# Altium PCB BBB_Board_NEW_PLANES.PcbDoc (part 2 of 4)
Units mil, origin at the board's own origin, x right, y up, seen from the top; angles counter-clockwise.
Board outline 11000 x 5000 mil, 2 copper layers (Top Layer, Bottom Layer); 103 components, 383 nets, 1066 pads, 514 vias.
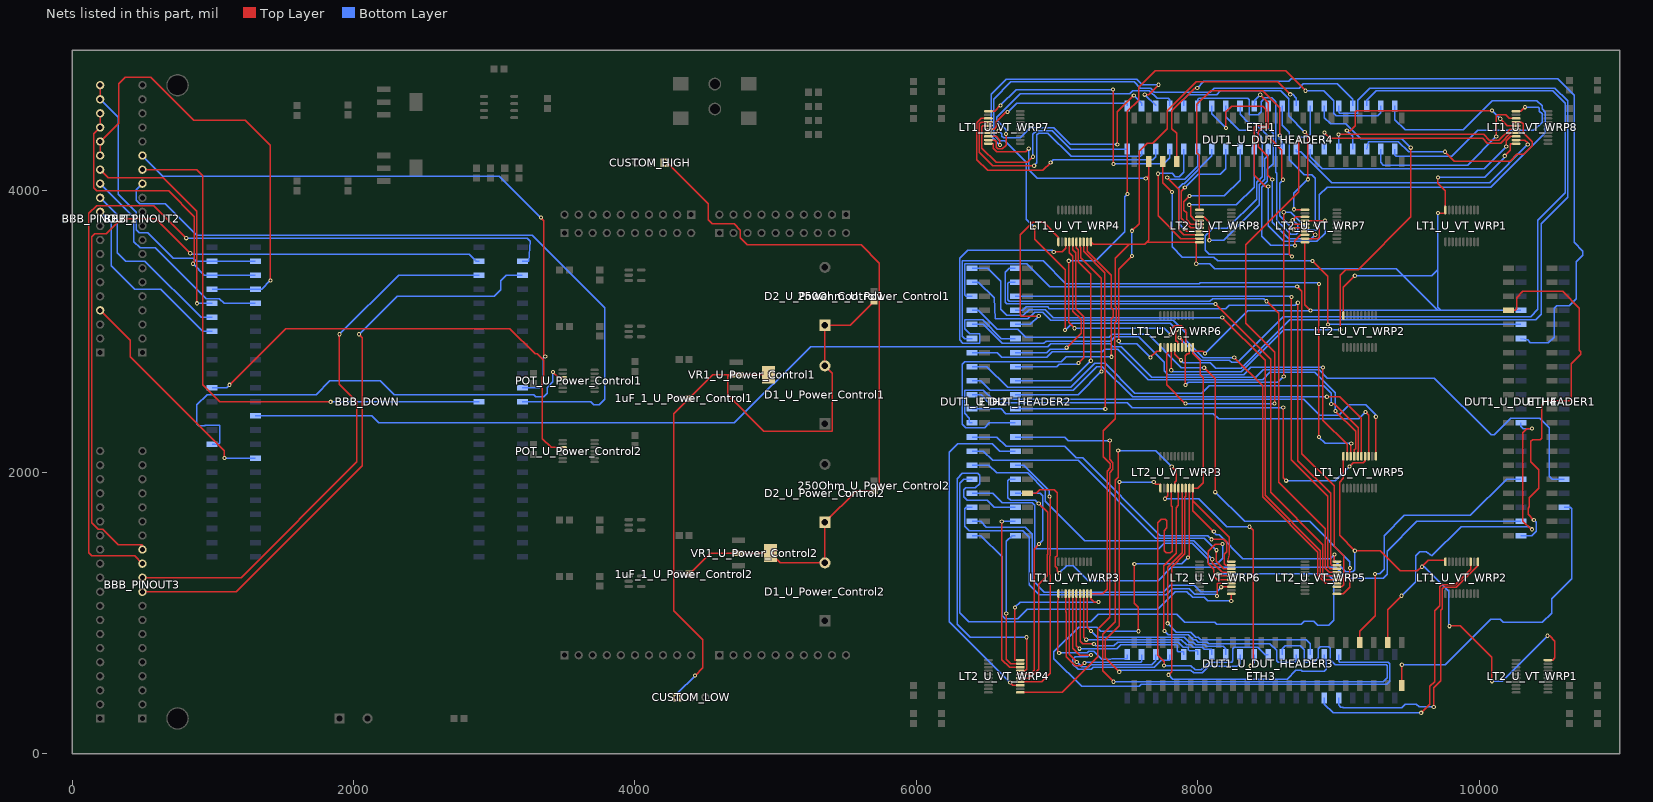
[diagram p2: the nets of this part, all layers, seen from the top]

## Via types
v1: diameter 30, hole 15, Top Layer to Bottom Layer, 514 vias

## Nets (pads, with @x,y where several pads share a name; then routed paths per layer and width w, separated by ;. In a path a pad name is that pad's centre, name@x,y a point inside that pad or via, vN(x,y) a via of type N, cw(c..) or ccw(c..) an arc to the next point about the centre after c; other vN are vias at no path point) (continued)
BBB_MMC1_DAT1: BBB_DOWN.70 BBB_PINOUT2.13 | length 5044.7
  Bottom Layer w10: BBB_PINOUT2.13@500,4050 456,4006 456,3931 481,3906 664,3906 886,3684 3270.54,3684 3787,3167.54 3787,2520 3746,2479 3706,2479 3685,2500 BBB_DOWN.70@3200,2500
BBB_MMC1_DAT2: BBB_DOWN.51 BBB_PINOUT3.11 | length 3990.9
  Top Layer w10: BBB_PINOUT3.11@500,1250 1201,1250 2024.88,2073.88 2024.88,2500.12 1900,2625 v1(1900,2980)
  Bottom Layer w10: v1(1900,2980) 2320,3400 BBB_DOWN.51@2892.91,3400
BBB_MMC1_DAT3: BBB_DOWN.52 BBB_PINOUT3.10 | length 4249.6
  Top Layer w10: BBB_PINOUT3.10@500,1150 1167.48,1150 2064,2046.52 2064,2956 v1(2040,2980)
  Bottom Layer w10: v1(2040,2980) 2310,3250 3000,3250 3047,3297 3047,3360 3087,3400 BBB_DOWN.52@3200,3400
BBB_MMC1_DAT4: BBB_DOWN.69 BBB_PINOUT2.14 | length 3948
  Top Layer w10: BBB_PINOUT2.14@500,4150 886,4150 928,4108 928,2620 1048,2500 v1(1838,2500)
  Bottom Layer w10: v1(1838,2500) BBB_DOWN.69@2892.91,2500
BBB_MMC1_DAT5: BBB_DOWN.68 BBB_PINOUT2.15 | length 4374.1
  Top Layer w10: v1(3332,3809) 3352.76,3788.24 3352.76,2832.97 v1(3362.76,2822.97)
  Bottom Layer w10: BBB_PINOUT2.15@500,4250 646,4104 3037,4104 v1(3332,3809) ; BBB_DOWN.68@3200,2600 3320,2600 3350,2630 3350,2810.21 v1(3362.76,2822.97)
BBB_MMC1_DAT6: BBB_DOWN.49 BBB_PINOUT3.13 | length 5421.6
  Top Layer w10: BBB_PINOUT3.13@500,1450 500,1483 330,1483 219,1594 186,1594 139,1641 139,3672 161,3694 244,3694 350,3800 596,3800 v1(840,3556)
  Bottom Layer w10: v1(840,3556) 846.27,3549.73 2823.27,3549.73 2873,3500 BBB_DOWN.49@2892.91,3500
BBB_MMC1_DAT7: BBB_DOWN.50 BBB_PINOUT3.12 | length 6276.8
  Top Layer w10: BBB_PINOUT3.12@500,1350 445,1405 141,1405 120,1426 120,3839 175,3894 581,3894 v1(812,3663)
  Bottom Layer w10: v1(812,3663) 3234,3663 3257,3640 3247,3500 BBB_DOWN.50@3200,3500
BBB_PWR_BUT: BBB_DOWN.9 BBB_PINOUT1.14 | length 1571.8
  Top Layer w10: BBB_PINOUT1.14@200,4150 256,4094 647,4094 888,3853 v1(888,3200)
  Bottom Layer w10: v1(888,3200) BBB_DOWN.9@995.83,3200
BBB_SYS_5V: BBB_DOWN.7 BBB_DOWN.8 BBB_PINOUT1.15 BBB_PINOUT1.16 | length 3264.9
  Top Layer w10: BBB_PINOUT1.15@200,4250 BBB_PINOUT1.16@200,4350 331,4481 331,4760 379,4808 558,4808 864,4502 1232,4502 1410,4324 v1(1410,3363)
  Bottom Layer w10: BBB_DOWN.7@995.83,3300 BBB_DOWN.8@1302.91,3300 1347,3300 v1(1410,3363)
BBB_SYS_RST: BBB_DOWN.10 BBB_PINOUT1.13 | length 1556.3
  Bottom Layer w10: BBB_PINOUT1.13@200,4050 439,3811 439,3638 483,3594 593,3594 953,3234 1047,3234 1081,3200 BBB_DOWN.10@1302.91,3200
BBB_UART4_RXD: BBB_DOWN.11 BBB_PINOUT1.12 | length 1305.5
  Bottom Layer w10: BBB_PINOUT1.12@200,3950 320,3830 320,3561 381,3500 518,3500 918,3100 BBB_DOWN.11@995.83,3100
BBB_UART4_TXD: BBB_DOWN.13 BBB_PINOUT1.11 | length 1325.4
  Bottom Layer w10: BBB_PINOUT1.11@200,3850 279,3771 279,3468 447,3300 629,3300 929,3000 BBB_DOWN.13@995.83,3000
BBB_VDD_3V3: BBB_DOWN.3 BBB_DOWN.4 BBB_PINOUT1.19 BBB_PINOUT1.20 | length 2072.3
  Top Layer w10: BBB_PINOUT1.19@200,4650 BBB_PINOUT1.20@200,4750
  Bottom Layer w10: BBB_PINOUT1.19@200,4650 328,4522 328,3975.47 457.47,3846 457.47,3721.53 479,3700 536.57,3700 717.57,3519 862,3519 881,3500 BBB_DOWN.3@995.83,3500 BBB_DOWN.4@1302.91,3500
BBB_VDD_5V: BBB_DOWN.5 BBB_DOWN.6 BBB_PINOUT1.17 BBB_PINOUT1.18 | length 2160.9
  Top Layer w10: BBB_PINOUT1.18@200,4550 BBB_PINOUT1.17@200,4450 156,4406 156,4021 177,4000 686,4000 869,3817 869,3490 v1(860,3481)
  Bottom Layer w10: v1(860,3481) 941,3400 BBB_DOWN.5@995.83,3400 BBB_DOWN.6@1302.91,3400
BBB_VDD_ADC: BBB_DOWN.32 BBB_PINOUT1.4 | length 1635.7
  Top Layer w10: BBB_PINOUT1.4@200,3150 413,2937 413,2822 1083,2152 v1(1083,2100)
  Bottom Layer w10: v1(1083,2100) BBB_DOWN.32@1302.91,2100
COUNTER_CLK0: DUT1_U_DUT_HEADER4.24 ETH4.35 | length 5519.4
  Top Layer w10: DUT1_U_DUT_HEADER4.24@7850,4208.96 7850,4407 7816,4441 7816,4568 7978,4730 v1(7996,4730)
  Bottom Layer w10: v1(7996,4730) 8043,4777 8645.73,4777 8663.73,4795 10559,4795 10674,4680 10674,3633 10737,3570 10737,3540 10691,3494 10691,3234 10641,3184 10551,3184 10532,3165 10532,2959 10492,2919 10364,2919 10343,2940 ETH4.35@10296.46,2950
COUNTER_CLK1: DUT1_U_DUT_HEADER3.24 ETH4.25 | length 1987.9
  Top Layer w10: DUT1_U_DUT_HEADER3.24@9150,791.04 9150,868.6 9260,978.6 v1(9260,1277)
  Bottom Layer w10: v1(9260,1277) 9294,1277 9326,1309 9326,1550 9468.37,1692.37 9937.37,1692.37 10195,1950 ETH4.25@10296.46,1950
COUNTER_CLK2: DUT1_U_DUT_HEADER2.24 ETH4.22 | length 4492.6
  Top Layer w10: DUT1_U_DUT_HEADER2.24@6791.04,1850 6852,1850 6877,1875 6979.13,1875 7001,1853.13 7001,1407.76 7000.92,1407.69 7000.79,1407.69 6987.98,1394.88 6987.98,1331.5 7001,1318.48 7001,1300 v1(7017,1284)
  Bottom Layer w10: v1(7017,1284) 7068,1335 7116,1335 7221,1230 7718.84,1230 7811.84,1323 8979.73,1323 9054.73,1248 9317.63,1248 9345,1275.37 9345,1440 9555,1650 ETH4.22@10296.46,1650
COUNTER_CLK3: DUT1_U_DUT_HEADER1.24 ETH4.21 | length 2721.7
  Top Layer w10: DUT1_U_DUT_HEADER1.24@10208.96,3150 10255,3150 10265,3160 10265,3240 10310,3285 10592,3285 10712,3165 10712,2865.36 10722.61,2854.75 10722.61,2837.61 10655,2770 10655,2522 10640,2507 10472,2507 10444,2479 10444,2241 10435,2232 10379,2232 10367,2220 10367,2074.45 10423,2018.45 10423,1886 10357,1820 10357,1753 10347,1743 10347,1701 v1(10388,1660)
  Bottom Layer w10: ETH4.21@10296.46,1550 10374,1550 10404,1580 10404,1644 v1(10388,1660)
COUNTER_CLR: DUT1_U_DUT_HEADER4.23 ETH4.36 | length 3542.6
  Top Layer w10: DUT1_U_DUT_HEADER4.23@7750,4208.96 7750,4058 v1(7817,3991) ; v1(8815,3501) 8925,3391 v1(8925,3050)
  Bottom Layer w10: v1(7817,3991) 7817,3601.94 7890.94,3528 8113,3528 8140,3501 v1(8815,3501) ; v1(8925,3050) ETH4.36@10296.46,3050
CUSTOM_HIGH: 1uF_1_U_Power_Control2.2 250Ohm_U_Power_Control2.2 CUSTOM_HIGH.1 D1_U_Power_Control2.1 D2_U_Power_Control2.2 VR1_U_Power_Control2.2 VR1_U_Power_Control2.4 | length 5342
  Top Layer w10: CUSTOM_HIGH.1@4210,4200 4228,4200 4521,3907 4521,3793 4549,3765 4705,3765 4750,3720 4750,3665 4800,3615 5608,3615 5738,3485 5738,1907 250Ohm_U_Power_Control2.2@5700,1869 5574.91,1869 D2_U_Power_Control2.2@5350,1644.09 D1_U_Power_Control2.1@5350,1355.91 5033.27,1355.91 VR1_U_Power_Control2.4@4964.17,1425 VR1_U_Power_Control2.2@4735.83,1425 4535,1425 1uF_1_U_Power_Control2.2@4385,1275
CUSTOM_LOW: 1uF_1_U_Power_Control1.2 250Ohm_U_Power_Control1.2 CUSTOM_LOW.1 D1_U_Power_Control1.1 D2_U_Power_Control1.2 VR1_U_Power_Control1.2 VR1_U_Power_Control1.4 | length 5157.6
  Top Layer w10: v1(4427,555) 4481,609 4481,811 4276,1016 4276,2416 1uF_1_U_Power_Control1.2@4385,2525 4552,2692 4670,2692 ; VR1_U_Power_Control1.4@4949.17,2692 VR1_U_Power_Control1.2@4720.83,2692 4670,2692 ; 250Ohm_U_Power_Control1.2@5700,3215 5529.09,3044.09 D2_U_Power_Control1.2@5350,3044.09 D1_U_Power_Control1.1@5350,2755.91 5403,2702.91 5403,2291 4917,2291 4659,2549 4659,2681 4670,2692
  Bottom Layer w10: CUSTOM_LOW.1@4300,400 4300,428 v1(4427,555)
DIN0: BBB_DOWN.21 POT_U_Power_Control2.10 | length 3353
  Top Layer w10: v1(1119,2621) 1518,3020 3111,3020 3290,2841 3305.13,2841 3351,2795.13 3351,2684.05 3343,2676.05 3343,2237 3404.41,2175.59 POT_U_Power_Control2.10@3486.81,2175.59
  Bottom Layer w10: BBB_DOWN.21@995.83,2600 1098,2600 v1(1119,2621)
DIN1: BBB_DOWN.29 POT_U_Power_Control1.10 | length 3353.2
  Top Layer w10: v1(3417,2712) 3453.41,2675.59 POT_U_Power_Control1.10@3486.81,2675.59
  Bottom Layer w10: BBB_DOWN.29@995.83,2200 1039,2200 1050,2211 1050,2332 1048,2334 945,2334 942,2331 901,2331 888,2344 888,2479 961,2552 1734,2552 1832,2650 2192,2650 2290,2552 3282,2552 3297,2537 3353,2537 3376,2560 3376,2600 3417,2641 v1(3417,2712)
FPGA_EN: DUT1_U_DUT_HEADER4.22 ETH4.37 LT1_U_VT_WRP1.10 LT1_U_VT_WRP2.10 LT1_U_VT_WRP3.10 LT1_U_VT_WRP4.10 LT1_U_VT_WRP5.10 LT1_U_VT_WRP6.10 LT1_U_VT_WRP7.10 LT1_U_VT_WRP8.10 LT2_U_VT_WRP1.10 LT2_U_VT_WRP2.10 LT2_U_VT_WRP3.10 LT2_U_VT_WRP4.10 LT2_U_VT_WRP5.10 LT2_U_VT_WRP6.10 LT2_U_VT_WRP7.10 LT2_U_VT_WRP8.10 | length 21304.9
  Top Layer w10: LT1_U_VT_WRP7.10@6511.81,4334.84 6547,4334.84 6547,4301 6570,4278 6778,4278 v1(6799,4299) ; v1(6700,1039) 6700,665.16 LT2_U_VT_WRP4.10@6738.19,665.16 ; LT1_U_VT_WRP3.10@7240.16,1136.81 LT1_U_VT_WRP3.10@7240.16,1136 ; LT1_U_VT_WRP4.10@7240.16,3636.81 7256.48,3620.49 7514.49,3620.49 ; v1(7295,1077) 7263.16,1077 7240.16,1100 LT1_U_VT_WRP3.10@7240.16,1136 ; v1(7630,4088) 7650,4108 ; DUT1_U_DUT_HEADER4.22@7650,4208.96 7650,4108 ; LT2_U_VT_WRP3.10@7965.16,1886.81 LT2_U_VT_WRP3.10@7965.16,1886 ; LT1_U_VT_WRP6.10@7965.16,2886.81 LT1_U_VT_WRP6.10@7965.16,2860.31 ; v1(7989,3481) LT2_U_VT_WRP8.10@7989,3634.84 ; LT2_U_VT_WRP8.10@8011.81,3634.84 LT2_U_VT_WRP8.10@7989,3634.84 ; v1(8052,2844) 8035.69,2860.31 LT1_U_VT_WRP6.10@7965.16,2860.31 ; v1(8114,1578) 7965.16,1726.84 7965.16,1795.94 ; LT2_U_VT_WRP6.10@8238.19,1365.16 8212,1365.16 8213.24,1370.73 8223,1414.44 8223,1538.1 7965.16,1795.94 ; LT2_U_VT_WRP7.10@8761.81,3634.84 8761,3634.84 8761,3189 v1(8800,3150) ; v1(8971,1415) 8971,1365.16 LT2_U_VT_WRP5.10@8988.19,1365.16 ; LT1_U_VT_WRP5.10@9034.84,2113.19 9034.84,1955.84 9007,1928 9007,1551 v1(9116,1442) 9295,1442 9439,1298 9560.34,1298 v1@9592.17,1329.83 ; LT2_U_VT_WRP2.10@9034.84,3113.19 9034.84,3314.84 v1(9116,3396) ; v1(9594,1328) v1@9592.17,1329.83 ; v1(9706,3841) 9759.84,3841 LT1_U_VT_WRP1.10@9759.84,3863.19 9759.84,4001.16 9706,4055 v1(9706,4095) ; LT1_U_VT_WRP2.10@9759.84,1363.19 9759.84,1373.65 9635.99,1373.65 v1@9592.17,1329.83 ; v1(9788,906) 9792,910 9864,910 10090,684 v1(10090,515) ; v1(10181,4248) 10222,4289 10222,4334.84 LT1_U_VT_WRP8.10@10261.81,4334.84 ; v1(10486,838) 10500,838 10538,800 10538,680 10523.16,665.16 LT2_U_VT_WRP1.10@10488.19,665.16 ; LT1_U_VT_WRP3.10@7240.16,1136 7323,1136 7356,1169 7356,2007 7379,2030 7379,2060 7329,2110 7329,2296 7414,2381 7414,2884.5 7409,2889.5 7409,3062 7421,3074 7421,3173.79 7414,3180.79 7414,3520 7514.49,3620.49 ; 7514.49,3620.49 7622.17,3620.49 7636.53,3634.84 ; 7636.53,3634.84 7650,3648.31 7650,4108 ; 7636.53,3634.84 LT2_U_VT_WRP8.10@7989,3634.84 ; 7965.16,1795.94 LT2_U_VT_WRP3.10@7965.16,1886 ; LT2_U_VT_WRP3.10@7965.16,1886 8000,1886 8039,1925 8039,2672 8017.15,2693.85 8017.15,2792 7965.16,2844 LT1_U_VT_WRP6.10@7965.16,2860.31
  Bottom Layer w10: v1(6700,1039) 6738,1077 v1(7295,1077) ; v1(6799,4299) 6799,4149 6860,4088 v1(7630,4088) ; v1(7989,3481) 8086.55,3481 8121.31,3446.23 9409.77,3446.23 9460,3396 ; v1(8052,2844) 8356,3148 8798,3148 v1(8800,3150) 9706,3150 ; v1(8114,1578) 8114,1570 8130,1554 8153,1554 8321,1386 8942,1386 v1(8971,1415) 8971,1374 9053,1292 9100,1292 9116,1308 v1(9116,1442) ; v1(9116,3396) 9460,3396 ; v1(9594,1328) 9610,1328 9784,1154 9784,910 v1(9788,906) ; v1(9706,4095) 10038,4095 10181,4238 v1(10181,4248) ; v1(10090,515) 10163,515 v1(10486,838) ; ETH4.37@10296.46,3150 9727.89,3150 ; 9460,3396 9706,3150 ; 9460,3396 9662,3396 9705,3439 ; 9705,3439 9706,3440 v1(9706,3841) 9705,3840 9705,3439 ; 9705,3439 9705,3172.89 9727.89,3150 ; 9706,3150 9727.89,3150
FPGA_Q: DUT1_U_DUT_HEADER3.20 ETH4.18 | length 2239.5
  Top Layer w10: DUT1_U_DUT_HEADER3.20@9450,483.96 v1(9450,632)
  Bottom Layer w10: v1(9450,632) 9757,632 10080,955 10148,955 10171,932 10447,932 10514,999 10514,1102 10656,1244 10656,1740 10646,1750 ETH4.18@10603.54,1750
FPGA_RX: BBB_DOWN.26 ETH4.16 | length 10295.3
  Bottom Layer w10: BBB_DOWN.26@1302.91,2400 2130,2400 2179.31,2350.69 4706.69,2350.69 5248,2892 6933,2892 6954,2913 7376.17,2913 7396.17,2893 7455.85,2893 7673,2675.85 8412.85,2675.85 8465,2728 8862,2728 8921.5,2668.5 9681.5,2668.5 10084,2266 10107,2266 10225,2384 10430,2384 10499,2315 10499,1971 10520,1950 ETH4.16@10603.54,1950
FPGA_SHCP: DUT1_U_DUT_HEADER3.22 ETH4.29 | length 2541.9
  Top Layer w10: DUT1_U_DUT_HEADER3.22@9350,791.04 9350,1024 v1(9448,1122) ; v1(10375,1594) 10368,1594 10310,1652 10310,2281 10339,2310 v1(10375,2310)
  Bottom Layer w10: v1(9448,1122) 9548,1222 9548,1405 9576,1433 9624,1433 9663,1406 9871,1614 10355,1614 v1(10375,1594) ; ETH4.29@10296.46,2350 10296.46,2325.54 10312,2310 v1(10375,2310)
FPGA_SIG0: ETH1.1 LT1_U_VT_WRP8.1 | length 1478.9
  Top Layer w10: LT1_U_VT_WRP8.1@10261.81,4565.16 10296.16,4565.16 v1(10325,4594)
  Bottom Layer w10: ETH1.1@9400,4296.46 9400,4256 9410,4246 9806,4246 9989,4429 10388,4429 10446,4487 10446,4546 10428,4564 10428,4587 10421,4594 v1(10325,4594)
FPGA_SIG1: ETH1.2 LT1_U_VT_WRP8.3 | length 1308.6
  Top Layer w10: v1(10121,4386) 10121,4530 10131,4540 10186.98,4540 10213,4513.98 LT1_U_VT_WRP8.3@10261.81,4513.98
  Bottom Layer w10: ETH1.2@9300,4296.46 9300,4201 9319,4182 9917,4182 v1(10121,4386)
FPGA_SIG2: ETH1.3 LT1_U_VT_WRP8.4 | length 1562.7
  Top Layer w10: v1(9756,4277) 9822,4211 10220,4211 10268,4259 10317,4259 10378,4320 10378,4347 10312,4413 10312,4476.39 10300,4488.39 LT1_U_VT_WRP8.4@10261.81,4488.39
  Bottom Layer w10: ETH1.3@9200,4296.46 9210,4349 9426,4349 9498,4277 v1(9756,4277)
FPGA_SIG3: ETH1.4 LT1_U_VT_WRP8.5 | length 1513.4
  Top Layer w10: v1(9059,4428) 9085,4428 9117.31,4460.31 9117.31,4560.8 9126.52,4570 v1(10091,4570) ; v1(10149,4512) 10198.2,4462.8 LT1_U_VT_WRP8.5@10261.81,4462.8
  Bottom Layer w10: v1(9059,4428) 9100,4387 ETH1.4@9100,4296.46 ; v1(10091,4570) v1(10149,4512)
FPGA_SIG4: ETH1.5 LT1_U_VT_WRP8.6 | length 1415.6
  Top Layer w10: v1(9000,4400) 10030.5,4400 10072.5,4358 10140,4358 10219.2,4437.2 LT1_U_VT_WRP8.6@10261.81,4437.2
  Bottom Layer w10: ETH1.5@9000,4296.46 v1(9000,4400)
FPGA_SIG5: ETH1.6 LT1_U_VT_WRP8.7 | length 1539.1
  Top Layer w10: v1(8900,4413) 8941,4372 10024.5,4372 10057.5,4339 10151.54,4339 10224.16,4411.61 LT1_U_VT_WRP8.7@10261.81,4411.61
  Bottom Layer w10: ETH1.6@8900,4296.46 v1(8900,4413)
FPGA_SIG6: ETH1.7 LT1_U_VT_WRP8.8 | length 1668.4
  Top Layer w10: v1(10192,4314) 10192,4354 10224.02,4386.02 LT1_U_VT_WRP8.8@10261.81,4386.02
  Bottom Layer w10: ETH1.7@8800,4296.46 8800,4243 8885,4158 10036,4158 v1(10192,4314)
FPGA_SIG7: ETH1.8 LT1_U_VT_WRP8.9 | length 1968.9
  Top Layer w10: LT1_U_VT_WRP8.9@10261.81,4360.43 10324,4360.43 10344.43,4340 v1(10344.43,4329)
  Bottom Layer w10: ETH1.8@8700,4296.46 8700,4277 8732,4277 8951,4058 10073.43,4058 v1(10344.43,4329)
FPGA_SIG8: ETH1.9 LT2_U_VT_WRP8.1 | length 1739.3
  Top Layer w10: LT2_U_VT_WRP8.1@8011.81,3865.16 8011,3865.16 8011,4251 7993,4269 7993,4613 8091,4711 8461,4711 8583,4589 v1(8583,4392)
  Bottom Layer w10: v1(8583,4392) 8580,4389 8580,4369 8600,4349 ETH1.9@8600,4296.46
FPGA_SIG9: ETH1.10 LT2_U_VT_WRP8.3 | length 1095.3
  Top Layer w10: LT2_U_VT_WRP8.3@8011.81,3813.98 8044.02,3813.98 8082,3776 v1(8082,3648)
  Bottom Layer w10: v1(8082,3648) 8184,3648 8436,3900 8436,4043 8476,4083 8476,4226.8 8500,4250.8 ETH1.10@8500,4296.46
FPGA_SIG10: ETH1.11 LT2_U_VT_WRP8.4 | length 941.7
  Top Layer w10: v1(7939.31,3900) 7949,3890.31 7949,3822.39 7983,3788.39 LT2_U_VT_WRP8.4@8011.81,3788.39
  Bottom Layer w10: v1(7939.31,3900) 8273.7,3900 8400,4026.3 ETH1.11@8400,4296.46
FPGA_SIG11: ETH1.12 LT2_U_VT_WRP8.5 | length 926
  Top Layer w10: v1(7941,3963) 7901.31,3923.31 7901.31,3861 7920,3842.31 7920,3792.91 7950.11,3762.8 LT2_U_VT_WRP8.5@8011.81,3762.8
  Bottom Layer w10: v1(7941,3963) 8189,3963 8300,4074 ETH1.12@8300,4296.46
FPGA_SIG12: ETH1.13 LT2_U_VT_WRP8.6 | length 872.2
  Top Layer w10: v1(7908,4022.31) 7883.31,3997.63 7883.31,3803.59 7949.7,3737.2 LT2_U_VT_WRP8.6@8011.81,3737.2
  Bottom Layer w10: v1(7908,4022.31) 8002.69,4117 8160,4117 8200,4157 ETH1.13@8200,4296.46
FPGA_SIG13: ETH1.14 LT2_U_VT_WRP8.7 | length 802.3
  Top Layer w10: v1(7901,3730.53) 7919.91,3711.61 LT2_U_VT_WRP8.7@8011.81,3711.61
  Bottom Layer w10: v1(7901,3730.53) 7864,3767.53 7864,4020 7894.13,4050.13 7902.13,4050.13 8100,4248 ETH1.14@8100,4296.46
FPGA_SIG14: ETH1.15 LT2_U_VT_WRP8.8 | length 949.7
  Top Layer w10: v1(7783,4094) 7865,4012 7865,3721.95 7900.92,3686.02 LT2_U_VT_WRP8.8@8011.81,3686.02
  Bottom Layer w10: v1(7783,4094) 7795,4082 7907,4082 8000,4175 ETH1.15@8000,4296.46
FPGA_SIG15: ETH1.16 LT2_U_VT_WRP8.9 | length 1030.1
  Top Layer w10: v1(7718,4121) 7718,3822.43 7880,3660.43 LT2_U_VT_WRP8.9@8011.81,3660.43
  Bottom Layer w10: v1(7718,4121) 7720,4123 7818,4123 7841,4100 7869,4100 7900,4131 ETH1.16@7900,4296.46
FPGA_SIG16: ETH1.17 LT1_U_VT_WRP7.1 | length 1958.9
  Top Layer w10: LT1_U_VT_WRP7.1@6511.81,4565.16 6556.1,4565.16 v1(6596.95,4606) ; v1(7398,4718.92) 7398,4193 v1(7400,4191)
  Bottom Layer w10: v1(6596.95,4606) 6709.86,4718.92 v1(7398,4718.92) ; v1(7400,4191) 7757,4191 7800,4234 ETH1.17@7800,4296.46
FPGA_SIG17: ETH1.18 LT1_U_VT_WRP7.3 | length 1754.2
  Top Layer w10: LT1_U_VT_WRP7.3@6511.81,4513.98 6460,4513.98 6430,4483.98 6430,4221 6506,4145 6899,4145 v1(6954.5,4200.5)
  Bottom Layer w10: v1(6954.5,4200.5) 6974.5,4220.5 7680,4220.5 7700,4240.5 ETH1.18@7700,4296.46
FPGA_SIG18: ETH1.19 LT1_U_VT_WRP7.4 | length 1791.3
  Top Layer w10: LT1_U_VT_WRP7.4@6511.81,4488.39 6460,4488.39 6448,4476.39 6448,4273 6543,4178 v1(6837,4178)
  Bottom Layer w10: v1(6837,4178) 6857,4198 6857,4396.86 6870,4409.86 6933.46,4409.86 7099.32,4244 7590,4244 7600,4254 ETH1.19@7600,4296.46
FPGA_SIG19: ETH1.20 LT1_U_VT_WRP7.5 | length 1521.1
  Top Layer w10: LT1_U_VT_WRP7.5@6511.81,4462.8 6473,4462.8 6466,4455.8 6466,4301 6566,4201 6787,4201 v1(6828,4242)
  Bottom Layer w10: v1(6828,4242) 6828,4401 6854.86,4427.86 6964.14,4427.86 7096,4296 7500,4296 ETH1.20@7500,4296.46
FPGA_SIG20: ETH1.21 LT1_U_VT_WRP7.6 | length 1106.9
  Top Layer w10: LT1_U_VT_WRP7.6@6511.81,4437.2 6552.2,4437.2 6569,4454 6569,4492 6636,4559 v1(6648,4559)
  Bottom Layer w10: v1(6648,4559) 6712,4623 7500,4623 ETH1.21@7500,4603.54
FPGA_SIG21: ETH1.22 LT1_U_VT_WRP7.7 | length 1524.8
  Top Layer w10: LT1_U_VT_WRP7.7@6511.81,4411.61 6568.61,4411.61 v1(6583,4426) ; v1(7428,4329) 7428,4560 v1(7545.5,4677.5)
  Bottom Layer w10: v1(6583,4426) 6586,4426 6608,4404 6608,4387 6620,4375 6737,4375 6808,4446 6976,4446 7093,4329 v1(7428,4329) ; v1(7545.5,4677.5) 7600,4623 ETH1.22@7600,4603.54
FPGA_SIG22: ETH1.23 LT1_U_VT_WRP7.8 | length 2000.1
  Top Layer w10: LT1_U_VT_WRP7.8@6511.81,4386.02 6566.98,4386.02 6594,4359 v1(6594,4325) ; v1(7623,4683) 7651,4683 v1(7721,4753)
  Bottom Layer w10: v1(6594,4325) 6533,4386 6533,4686 6639,4792 7564.5,4792 7603.5,4753 v1(7721,4753) ; v1(7623,4683) 7700,4606 ETH1.23@7700,4603.54
FPGA_SIG23: ETH1.24 LT1_U_VT_WRP7.9 | length 1788.9
  Top Layer w10: LT1_U_VT_WRP7.9@6511.81,4360.43 6555.57,4360.43 6566,4350 6566,4310 6579,4297 6610,4297 6637,4324 v1(6637,4403)
  Bottom Layer w10: v1(6637,4403) 6637,4433 6570,4500 6570,4521 6739,4690 7517,4690 7538,4711 7656,4711 7711,4656 7790,4656 7800,4646 ETH1.24@7800,4603.54
FPGA_SIG24: ETH1.25 LT2_U_VT_WRP7.1 | length 1804.9
  Top Layer w10: v1(8683,3868) 8685.84,3865.16 LT2_U_VT_WRP7.1@8761.81,3865.16 ; v1(8760,4417) 8783,4394 v1(8783,4081)
  Bottom Layer w10: ETH1.25@7900,4603.54 7900,4650 7933.62,4683.62 8133.61,4683.62 8160.99,4711 8588,4711 8645,4654 8645,4532 v1(8760,4417) ; v1(8683,3868) 8683,3981 v1(8783,4081)
FPGA_SIG25: ETH1.26 LT2_U_VT_WRP7.3 | length 2059.2
  Top Layer w10: v1(8674,3792) 8695.98,3813.98 LT2_U_VT_WRP7.3@8761.81,3813.98
  Bottom Layer w10: ETH1.26@8000,4603.54 8000,4649 8010,4659 8355,4659 8366,4648 8366,4544 8370,4540 8430,4540 8450,4560 8450,4634 8476,4660 8525,4660 8553,4632 8553,4131.69 8560,4124.69 8560,3791 8661,3690 8698,3690 8709,3701 8709,3757 v1(8674,3792)
FPGA_SIG26: ETH1.27 LT2_U_VT_WRP7.4 | length 2279.6
  Top Layer w10: v1(8200,4446) 8200,4561 8240,4601 8461.69,4601 8483,4579.69 8483,4463.31 8482.69,4463 8415,4463 8402,4450 8402,4110 8482,4030 v1(8501,4030) ; LT2_U_VT_WRP7.4@8761.81,3788.39 v1(8904,3788.39)
  Bottom Layer w10: ETH1.27@8100,4603.54 8100,4546 v1(8200,4446) ; v1(8501,4030) 8501,3751.92 8611.92,3641 8845.3,3641 8904,3699.7 v1(8904,3788.39)
FPGA_SIG27: ETH1.28 LT2_U_VT_WRP7.5 | length 2397.5
  Top Layer w10: v1(8669,3532) 8651,3550 8651,3739 8674.8,3762.8 LT2_U_VT_WRP7.5@8761.81,3762.8
  Bottom Layer w10: ETH1.28@8200,4603.54 8200,4525 8296,4429 8407,4429 8458,4378 8458,4101 8418,4061 8418,3940 8210,3732 8105,3732 8053,3680 8053,3577 8080,3550 8651,3550 v1(8669,3532)
FPGA_SIG28: ETH1.29 LT2_U_VT_WRP7.6 | length 1164.7
  Top Layer w10: v1(8506,4379) 8597,4288 8597,4087.31 v1(8606,4078.31) ; v1(8680,3726) 8691.2,3737.2 LT2_U_VT_WRP7.6@8761.81,3737.2
  Bottom Layer w10: ETH1.29@8300,4603.54 8300,4545 8360,4485 8400,4485 v1(8506,4379) ; v1(8606,4078.31) 8582,4054.31 8582,3824 v1(8680,3726)
FPGA_SIG29: ETH1.30 LT2_U_VT_WRP7.7 | length 1572.9
  Top Layer w10: v1(8444,4682) 8502,4624 8501,4445 8455,4445 8429,4419 8429,4312.68 8498,4243.68 8498,4110.69 v1(8529,4079.69) ; LT2_U_VT_WRP7.7@8761.81,3711.61 8810.39,3711.61 v1(8835,3687)
  Bottom Layer w10: ETH1.30@8400,4603.54 8406,4644 v1(8444,4682) ; v1(8529,4079.69) 8529,3775 8645,3659 8807,3659 v1(8835,3687)
FPGA_SIG30: ETH1.31 LT2_U_VT_WRP7.8 | length 1361.3
  Top Layer w10: v1(8690,3611) 8690,3646.02 8730,3686.02 LT2_U_VT_WRP7.8@8761.81,3686.02
  Bottom Layer w10: ETH1.31@8500,4603.54 8500,4442 8535,4407 8535,4192.8 8495,4152.8 8495,4066 8454,4025 8454,3677 8520,3611 v1(8690,3611)
FPGA_SIG31: ETH1.32 LT2_U_VT_WRP7.9 | length 1182
  Top Layer w10: LT2_U_VT_WRP7.9@8761.81,3660.43 8809.57,3660.43 8812,3658 8851,3658 8864,3671 8864,3729 v1(8835,3758)
  Bottom Layer w10: ETH1.32@8600,4603.54 8600,4464 8649,4415 8649,4221 8756.67,4113.33 8810.43,4113.33 8835,4088.76 v1(8835,3758)
FPGA_SIG32: ETH1.33 LT1_U_VT_WRP6.1 | length 3303.1
  Top Layer w10: v1(7438,2933) 7440,2935 7440,3180.79 7437,3183.79 7437,3441 v1(7532,3536) ; v1(7532,3715) 7583,3766 7583,4280 7640,4337 7680,4337 7784,4441 7784,4568 7990,4774 8568,4774 v1(8657,4685) ; v1(7662.93,2816) 7708,2861.07 7734.84,2861.07 LT1_U_VT_WRP6.1@7734.84,2886.81
  Bottom Layer w10: v1(7438,2933) 7438,2925 7449,2914 7564.93,2914 v1(7662.93,2816) ; v1(7532,3536) v1(7532,3715) ; v1(8657,4685) 8674,4685 8700,4659 ETH1.33@8700,4603.54
FPGA_SIG33: ETH1.34 LT1_U_VT_WRP6.3 | length 3519.1
  Top Layer w10: LT1_U_VT_WRP6.3@7786.02,2886.81 7786.02,2850.02 7778,2842 7778,2622 v1(7912,2488) ; v1(8546,2488) 8546,2854 8341,3059 8341,3616.93 8717,3992.93 v1(8717,4381)
  Bottom Layer w10: v1(7912,2488) v1(8546,2488) ; v1(8717,4381) 8780,4381 8800,4401 ETH1.34@8800,4603.54
FPGA_SIG34: ETH1.35 LT1_U_VT_WRP6.4 | length 3828.5
  Top Layer w10: v1(7811.61,2724.39) LT1_U_VT_WRP6.4@7811.61,2886.81 ; v1(9012,3013) 9012,3400 9052,3440 9139,3440 9513,3814 v1(9513,4306)
  Bottom Layer w10: v1(7811.61,2724.39) 7823,2713 8310,2713 8610,3013 v1(9012,3013) ; ETH1.35@8900,4603.54 8900,4520 8944,4476 9051,4476 9159,4368 9451,4368 v1(9513,4306)
FPGA_SIG35: ETH1.36 LT1_U_VT_WRP6.5 | length 6285.7
  Top Layer w10: LT1_U_VT_WRP6.5@7837.2,2886.81 7837.2,2838.8 v1(7880,2796)
  Bottom Layer w10: v1(7880,2796) 7897,2779 8087,2779 8126.58,2739.42 8310.42,2739.42 8655,3084 10401,3084 10440,3123 10440,3766 10629,3955 10629,4638 10538,4729 9222,4729 9137,4644 9137,4551 9010,4551 9000,4561 ETH1.36@9000,4603.54
FPGA_SIG36: ETH1.37 LT1_U_VT_WRP6.6 | length 5599.2
  Top Layer w10: v1(6840,3740) 6840,3657 7057,3440 v1(7057,3010) ; v1(7852.39,3013) 7842,3002.61 7842,2931 7859,2931 LT1_U_VT_WRP6.6@7862.8,2886.81
  Bottom Layer w10: v1(6840,3740) 6781,3799 6781,4202.83 6626.83,4357 6591,4357 6551,4397 6551,4651.9 6672.1,4773 7547.5,4773 7591.5,4729 7664,4729 7691.38,4701.62 8087.61,4701.62 8115.99,4730 8721.84,4730 8750.84,4759 8990,4759 9100,4649 ETH1.37@9100,4603.54 ; v1(7057,3010) 7107,3060 7805.39,3060 v1(7852.39,3013)
FPGA_SIG37: ETH1.38 LT1_U_VT_WRP6.7 | length 5916.6
  Top Layer w10: v1(7870,2958) 7888.39,2939.61 LT1_U_VT_WRP6.7@7888.39,2886.81
  Bottom Layer w10: v1(7870,2958) 7870,2952 8025,2797 8225.12,2797 8242.12,2780 8282.12,2780 8607.96,3105.84 10364.84,3105.84 10416,3157 10416,3791 10610.01,3985.01 10610.01,4620.9 10520.91,4710 9267,4710 9200,4643 ETH1.38@9200,4603.54
FPGA_SIG38: ETH1.39 LT1_U_VT_WRP6.8 | length 5048.3
  Top Layer w10: v1(7083,3502) 7083,3064 v1(7124,3023) ; v1(7500,3976) 7500,4564.77 7579,4643.77 7579,4735 7696,4852 8624.87,4852 v1(8765.87,4711) ; v1(7807,2978) 7807,3013 7835,3041 7880.93,3041 7913.98,3007.95 LT1_U_VT_WRP6.8@7913.98,2886.81
  Bottom Layer w10: v1(7083,3502) 7274,3502 7480,3708 7480,3956 v1(7500,3976) ; v1(7124,3023) 7762,3023 v1(7807,2978) ; v1(8765.87,4711) 8895.31,4711 8966.31,4640 8966.31,4552 8985.31,4533 9280,4533 9300,4553 ETH1.39@9300,4603.54
FPGA_SIG39: ETH1.40 LT1_U_VT_WRP6.9 | length 5986.6
  Top Layer w10: v1(7913,2620) 7912,2621 7912,2829 7925,2842 7939.57,2842 LT1_U_VT_WRP6.9@7939.57,2886.81 ; v1(8611,2681) v1(8611,3847)
  Bottom Layer w10: v1(7913,2620) 7931,2638 8568,2638 v1(8611,2681) ; v1(8611,3847) 8660,3847 8788.62,3718.38 8841.38,3718.38 8864,3741 8864,3970.09 8919.51,4025.6 10082.6,4025.6 10469,4412 10469,4559 10447,4581 10447,4604 10410,4641 10093,4641 9885,4433 9473,4433 9400,4506 ETH1.40@9400,4603.54
FPGA_SIG40: ETH2.1 LT2_U_VT_WRP6.1 | length 2489.8
  Top Layer w10: v1(8238,1085) 8238,1134.84 LT2_U_VT_WRP6.1@8238.19,1134.84
  Bottom Layer w10: ETH2.1@6396.46,1550 6459,1550 6611,1398 6611,980 6633,958 6719,958 6788,1027 7715,1027 7840,1152 7922.52,1152 7962.52,1112 8046,1112 8072,1086 8237,1086 v1(8238,1085)
FPGA_SIG41: ETH2.2 LT2_U_VT_WRP6.3 | length 2294.5
  Top Layer w10: v1(8166,1183) 8169.02,1186.02 LT2_U_VT_WRP6.3@8238.19,1186.02
  Bottom Layer w10: ETH2.2@6396.46,1650 6457,1650 6498,1609 6773,1609 6822,1560 6822,1235 6909,1148 7754.5,1148 7803.5,1197 7975.52,1197 8022.27,1150.25 8133.25,1150.25 v1(8166,1183)
FPGA_SIG42: ETH2.3 LT2_U_VT_WRP6.4 | length 2601.3
  Top Layer w10: v1(8137,1121) 8137,1209.92 8138.69,1211.61 LT2_U_VT_WRP6.4@8238.19,1211.61
  Bottom Layer w10: ETH2.3@6396.46,1750 6354.08,1750 6344.08,1740 6344.08,1617.31 6377.4,1584 6757,1584 6802,1539 6802,1201 6874,1129 7775,1129 7817,1171 7939.52,1171 7979.52,1131 8127,1131 v1(8137,1121)
FPGA_SIG43: ETH2.4 LT2_U_VT_WRP6.5 | length 2779.4
  Top Layer w10: v1(8176,1489) 8124,1489 8074,1439 8074,1349 8113,1310 8113,1261 8136.8,1237.2 LT2_U_VT_WRP6.5@8238.19,1237.2
  Bottom Layer w10: ETH2.4@6396.46,1850 6542.69,1850 6610,1782.69 6825.31,1782.69 6843,1765 6843,1461 6849,1455 7722,1455 7762,1495 7960.34,1495 8069.35,1385.99 8069.35,1362.65 8081,1351 8139,1351 8176,1388 v1(8176,1489)
FPGA_SIG44: ETH2.5 LT2_U_VT_WRP6.6 | length 5016.8
  Top Layer w10: v1(8142,1277) 8156.2,1262.8 LT2_U_VT_WRP6.6@8238.19,1262.8
  Bottom Layer w10: ETH2.5@6396.46,1950 6338,1950 6309,1921 6309,1001 6373,937 7240,937 7293,990 7850.65,990 7907.65,933 8119,933 8134,918 8733.47,918 8755.47,940 8825,940 8852,913 8931,913 8965,947 8965,1232 8920,1277 v1(8142,1277)
FPGA_SIG45: ETH2.6 LT2_U_VT_WRP6.7 | length 2214.6
  Top Layer w10: v1(8103,1381) 8103,1358 8172.61,1288.39 LT2_U_VT_WRP6.7@8238.19,1288.39
  Bottom Layer w10: ETH2.6@6396.46,2050 6515,2050 6570,1995 6791,1995 6917,1869 6917,1794 7198,1513 7971,1513 v1(8103,1381)
FPGA_SIG46: ETH2.7 LT2_U_VT_WRP6.8 | length 2235.1
  Top Layer w10: v1(8132,1446) 8132,1365.7 8183.72,1313.98 LT2_U_VT_WRP6.8@8238.19,1313.98
  Bottom Layer w10: ETH2.7@6396.46,2150 6476,2150 6542,2084 7148.91,2084 7701.91,1531 8047,1531 v1(8132,1446)
FPGA_SIG47: ETH2.8 LT2_U_VT_WRP6.9 | length 2333.3
  Top Layer w10: v1(8098,1523) 8184,1523 8205,1502 8205,1436 8187,1418 8187,1350 8197.43,1339.57 LT2_U_VT_WRP6.9@8238.19,1339.57
  Bottom Layer w10: ETH2.8@6396.46,2250 6572.17,2250 6639.17,2183 7055.05,2183 7135.05,2103 7180.79,2103 7733.79,1550 8071,1550 v1(8098,1523)
FPGA_SIG48: ETH2.9 LT1_U_VT_WRP5.1 | length 3619
  Top Layer w10: LT1_U_VT_WRP5.1@9265.16,2113.19 v1(9265.16,2394)
  Bottom Layer w10: ETH2.9@6396.46,2350 6377,2350 6377,2384.4 6344.08,2417.31 6344.08,2582.69 6477,2583 6543,2517 8753,2517 8867,2403 9000,2403 9077,2480 9195,2480 9265.16,2409.84 v1(9265.16,2394)
FPGA_SIG49: ETH2.10 LT1_U_VT_WRP5.3 | length 3169.3
  Top Layer w10: v1(9192.19,2428) 9213.98,2406.22 LT1_U_VT_WRP5.3@9213.98,2113.19
  Bottom Layer w10: ETH2.10@6396.46,2450 6602,2450 6635,2417 8110,2417 8148,2379 9143.19,2379 v1(9192.19,2428)
FPGA_SIG50: ETH2.11 LT1_U_VT_WRP5.4 | length 3427.5
  Top Layer w10: v1(8607,2459) 8607,1961 v1(8628,1940) ; v1(9078,2041) 9105,2068 9176.39,2068 9188.39,2080 LT1_U_VT_WRP5.4@9188.39,2113.19
  Bottom Layer w10: ETH2.11@6396.46,2550 6460,2550 6516,2494 7500,2494 7535,2459 v1(8607,2459) ; v1(8628,1940) 8977,1940 v1(9078,2041)
FPGA_SIG51: ETH2.12 LT1_U_VT_WRP5.5 | length 3286
  Top Layer w10: v1(8917,2536) 9010,2536 9162.8,2383.2 LT1_U_VT_WRP5.5@9162.8,2113.19
  Bottom Layer w10: ETH2.12@6396.46,2650 6458,2650 6525,2583 7114.97,2583 7282.97,2751 7322,2751 7537,2536 v1(8917,2536)
FPGA_SIG52: ETH2.13 LT1_U_VT_WRP5.6 | length 3354.8
  Top Layer w10: v1(8948,2485) 8971,2485 9140,2316 9140,2149.8 9137.2,2147 LT1_U_VT_WRP5.6@9137.2,2113.19
  Bottom Layer w10: ETH2.13@6396.46,2750 6501,2750 6649,2602 7098.18,2602 7268.83,2772.65 7341.35,2772.65 7552,2562 8029,2562 8080,2613 8895,2613 8948,2560 v1(8948,2485)
FPGA_SIG53: ETH2.14 LT1_U_VT_WRP5.7 | length 3303.8
  Top Layer w10: v1(8978,2433.94) 9122,2289.94 9122,2168.39 9111.61,2158 LT1_U_VT_WRP5.7@9111.61,2113.19
  Bottom Layer w10: ETH2.14@6396.46,2850 6575,2850 6608,2817 6927,2817 6966,2856 7322,2856 7340,2874 7432,2874 7648.15,2657.85 8460.43,2657.85 8511.58,2709 8832,2709 8978,2563 v1(8978,2433.94)
FPGA_SIG54: ETH2.15 LT1_U_VT_WRP5.8 | length 4649.4
  Top Layer w10: v1(8861,2250) v1(8861,3337) ; LT1_U_VT_WRP5.8@9086.02,2113.19 9086.02,2199.44 v1(9090.58,2204)
  Bottom Layer w10: ETH2.15@6396.46,2950 6343,2950 6326,2967 6326,3501 6899.94,3501 7061.94,3339 8010.16,3339 8018.16,3347 8851,3347 v1(8861,3337) ; v1(8861,2250) 8907,2204 v1(9090.58,2204)
FPGA_SIG55: ETH2.16 LT1_U_VT_WRP5.9 | length 3435.6
  Top Layer w10: v1(8889,2744) 8889,2368.43 9060.43,2197 LT1_U_VT_WRP5.9@9060.43,2113.19
  Bottom Layer w10: ETH2.16@6396.46,3050 6477,3050 6610,2917 6907,2917 6922,2932 7381,2932 7410,2961 7579.16,2961 7760.43,2779.73 7760.43,2720 7786.43,2694 8325.69,2694 8377.69,2746 8887,2746 v1(8889,2744)
FPGA_SIG56: ETH2.17 LT2_U_VT_WRP5.1 | length 4206.8
  Top Layer w10: v1(8045.15,2741.85) 8124,2663 v1(8124,1858) ; LT2_U_VT_WRP5.1@8988.19,1134.84 9033,1134.84 9081,1182.84 v1(9081,1320)
  Bottom Layer w10: ETH2.17@6396.46,3150 6440,3150 6575,3015 6722,3015 6779,2958 7371,2958 7392,2979 7646.58,2979 7883.74,2741.85 v1(8045.15,2741.85) ; v1(8124,1858) 8332.28,1649.72 8794.66,1649.72 9081,1363.38 v1(9081,1320)
FPGA_SIG57: ETH2.18 LT2_U_VT_WRP5.3 | length 5021.6
  Top Layer w10: v1(8706,3319) 8739,3286 8739,2132 8969,1902 8969,1475 9038,1406 9038,1200 9024.02,1186.02 LT2_U_VT_WRP5.3@8988.19,1186.02
  Bottom Layer w10: ETH2.18@6396.46,3250 6354,3250 6344,3260 6344,3483 6785,3483 6949,3319 v1(8706,3319)
FPGA_SIG58: ETH2.19 LT2_U_VT_WRP5.4 | length 4183.9
  Top Layer w10: v1(8259,2815) 8460,2614 8460,1824 8853,1431 8853,1267.54 8908.92,1211.61 LT2_U_VT_WRP5.4@8988.19,1211.61
  Bottom Layer w10: ETH2.19@6396.46,3350 6440,3350 6552,3238 6562,3090 6792.31,3090 6840,3137.69 6898.42,3137.69 6955.1,3081 7824.51,3081 7914.04,2991.47 7914.04,2937.96 8037,2815 v1(8259,2815)
FPGA_SIG59: ETH2.20 LT2_U_VT_WRP5.5 | length 4317.8
  Top Layer w10: v1(8174,3099) 8479,2794 8479,1835 8871,1443 8871,1276.2 8910,1237.2 LT2_U_VT_WRP5.5@8988.19,1237.2
  Bottom Layer w10: ETH2.20@6396.46,3450 6507,3450 6599,3358 6599,3158 6641,3116 6761.23,3116 6800.91,3155.69 6916.42,3155.69 6973.1,3099 v1(8174,3099)
FPGA_SIG60: ETH2.21 LT2_U_VT_WRP5.6 | length 4134.4
  Top Layer w10: v1(8125,3196) 8517,2804 8517,1856.04 8889,1484.04 8889,1284 8910.2,1262.8 LT2_U_VT_WRP5.6@8988.19,1262.8
  Bottom Layer w10: ETH2.21@6703.54,3450 6660,3450 6630,3420 6630,3208 6642,3196 v1(8125,3196)
FPGA_SIG61: ETH2.22 LT2_U_VT_WRP5.7 | length 4198.3
  Top Layer w10: v1(8489,3215) 8575,3129 8575,1930 8907,1598 8907,1316 8934.61,1288.39 LT2_U_VT_WRP5.7@8988.19,1288.39
  Bottom Layer w10: ETH2.22@6703.54,3350 6659,3350 6650,3341 6650,3224 6660,3214 8085,3214 8105,3234 8470,3234 v1(8489,3215)
FPGA_SIG62: ETH2.23 LT2_U_VT_WRP5.8 | length 4057.5
  Top Layer w10: v1(8665,3245) 8665,2090 8925,1830 8925,1328.98 8940,1313.98 LT2_U_VT_WRP5.8@8988.19,1313.98
  Bottom Layer w10: ETH2.23@6703.54,3250 8093,3252 8658,3252 v1(8665,3245)
FPGA_SIG63: ETH2.24 LT2_U_VT_WRP5.9 | length 4040.6
  Top Layer w10: v1(8711,3204) 8711,2083 8943,1851 8943,1346.57 8950,1339.57 LT2_U_VT_WRP5.9@8988.19,1339.57
  Bottom Layer w10: ETH2.24@6703.54,3150 6756.54,3150 6780.54,3174 6934.1,3174 6945.1,3163 8199,3163 8222,3186 8693,3186 v1(8711,3204)
FPGA_SIG64: ETH2.25 LT1_U_VT_WRP4.1 | length 1282.2
  Top Layer w10: v1(6870,3109) 6746.67,3109 6738,3117.67 6738,3688 6825.99,3775.99 6903.85,3775.99 7009.84,3670 LT1_U_VT_WRP4.1@7009.84,3636.81
  Bottom Layer w10: ETH2.25@6703.54,3050 6811,3050 v1(6870,3109)
FPGA_SIG65: ETH2.26 LT1_U_VT_WRP4.3 | length 2233
  Top Layer w10: v1(6976,3565) 7036,3565 7061.02,3590.02 LT1_U_VT_WRP4.3@7061.02,3636.81
  Bottom Layer w10: ETH2.26@6703.54,2950 6605,2950 6472,3083 6344,3083 6344,3019 6380,2983 6449,2983 6449,2917 6331,2917 6308,2940 6308,3520 6364,3576 6965,3576 v1(6976,3565)
FPGA_SIG66: ETH2.27 LT1_U_VT_WRP4.4 | length 1207.6
  Top Layer w10: v1(7068,2885) 7170,2987 7170,3085.13 7113,3142.13 7113,3533.23 7086.61,3559.61 LT1_U_VT_WRP4.4@7086.61,3636.81
  Bottom Layer w10: ETH2.27@6703.54,2850 6926.51,2850 6951.51,2875 7058,2875 v1(7068,2885)
FPGA_SIG67: ETH2.28 LT1_U_VT_WRP4.5 | length 1367.8
  Top Layer w10: LT1_U_VT_WRP4.5@7112.2,3636.81 7112.2,3580 7131.97,3560.23 7131.97,3163.03 7189,3106 7189,2812 v1(7152,2775)
  Bottom Layer w10: ETH2.28@6703.54,2750 6999,2750 7016,2767 7144,2767 v1(7152,2775)
FPGA_SIG68: ETH2.29 LT1_U_VT_WRP4.6 | length 1482.4
  Top Layer w10: LT1_U_VT_WRP4.6@7137.8,3636.81 7137.8,3594.4 7150,3582.2 7150,3495 7240,3405 v1(7240,2792)
  Bottom Layer w10: ETH2.29@6703.54,2650 7098,2650 v1(7240,2792)
FPGA_SIG69: ETH2.30 LT1_U_VT_WRP4.7 | length 1663.8
  Top Layer w10: LT1_U_VT_WRP4.7@7163.39,3636.81 7163.39,3600.23 7169.73,3593.88 7169.73,3523.49 7314.98,3378.24 v1(7314.98,2716.02)
  Bottom Layer w10: ETH2.30@6703.54,2550 7148.96,2550 v1(7314.98,2716.02)
FPGA_SIG70: ETH2.31 LT1_U_VT_WRP4.8 | length 1890.1
  Top Layer w10: LT1_U_VT_WRP4.8@7188.98,3636.81 7188.98,3569.02 7339,3419 7339,2786 7343,2782 v1(7343,2450)
  Bottom Layer w10: ETH2.31@6703.54,2450 v1(7343,2450)
FPGA_SIG71: ETH2.32 LT1_U_VT_WRP4.9 | length 2809.2
  Top Layer w10: LT1_U_VT_WRP4.9@7214.57,3636.81 7214.57,3570 7386,3398.57 7386,3168.43 7400,3154.43 7400,3105 7386,3091 v1(7386,2820)
  Bottom Layer w10: ETH2.32@6703.54,2350 6519,2350 6485,2316 6350.08,2316 6326.08,2340 6326.08,2766.08 6345.08,2785.08 7028.92,2785.08 7063.84,2820 v1(7386,2820)
FPGA_SIG72: ETH2.33 LT2_U_VT_WRP4.1 | length 2928.3
  Top Layer w10: LT2_U_VT_WRP4.1@6738.19,434.84 7036.79,434.84 7289,687.05 7289,884 7374,969 7374,1997 7397,2020 7397,2068 7374,2091 v1(7374,2225)
  Bottom Layer w10: ETH2.33@6703.54,2250 7055,2250 7080,2225 v1(7374,2225)
FPGA_SIG73: ETH2.34 LT2_U_VT_WRP4.3 | length 2410.2
  Top Layer w10: v1(6667,505) 6685.98,486.02 LT2_U_VT_WRP4.3@6738.19,486.02
  Bottom Layer w10: v1(6667,505) 6234,938 6234,2141.84 6292.84,2200.69 6540.92,2200.69 6591.6,2150 ETH2.34@6703.54,2150
FPGA_SIG74: ETH2.35 LT2_U_VT_WRP4.4 | length 1853
  Top Layer w10: LT2_U_VT_WRP4.4@6738.19,511.61 6889.34,511.61 6950,572.28 6950,1269.54 6949,1270.54 6949,1406.81 6950,1407.81 6950,1824 v1(6946,1828)
  Bottom Layer w10: ETH2.35@6703.54,2050 6764,2050 6946,1868 v1(6946,1828)
FPGA_SIG75: ETH2.36 LT2_U_VT_WRP4.5 | length 1799.7
  Top Layer w10: LT2_U_VT_WRP4.5@6738.19,537.2 6807.2,537.2 6870,600 6870,1203 6931,1264 6931,1414.27 6932,1415.27 6932,1715 v1(6870,1777)
  Bottom Layer w10: ETH2.36@6703.54,1950 6661,1950 6651,1940 6651,1820 6669,1802 6845,1802 v1(6870,1777)
FPGA_SIG76: ETH2.37 LT2_U_VT_WRP4.6 | length 1576.4
  Top Layer w10: LT2_U_VT_WRP4.6@6738.19,562.8 6806,562.8 6836,592.8 6836,1454 v1(6872,1490)
  Bottom Layer w10: ETH2.37@6703.54,1850 6879,1850 6898,1831 6898,1516 v1(6872,1490)
FPGA_SIG77: ETH2.38 LT2_U_VT_WRP4.7 | length 2665.3
  Top Layer w10: LT2_U_VT_WRP4.7@6738.19,588.39 6771.39,588.39 6783,600 v1(6783,827)
  Bottom Layer w10: ETH2.38@6703.54,1750 6554,1750 6503,1801 6360,1801 6337,1824 6337,1876 6350,1889 6420,1889 6449,1918 6449,1980 6436,1993 6327,1993 6289,1955 6289,921 6383,827 v1(6783,827)
FPGA_SIG78: ETH2.39 LT2_U_VT_WRP4.8 | length 1231.6
  Top Layer w10: v1(6607,1650) 6607,668.9 6661.93,613.98 LT2_U_VT_WRP4.8@6738.19,613.98
  Bottom Layer w10: v1(6607,1650) ETH2.39@6703.54,1650
FPGA_SIG79: ETH2.40 LT2_U_VT_WRP4.9 | length 1031
  Top Layer w10: v1(6639,996) 6639,672.34 6671.78,639.57 LT2_U_VT_WRP4.9@6738.19,639.57
  Bottom Layer w10: v1(6639,996) 6639,1509 6680,1550 ETH2.40@6703.54,1550
FPGA_SIG80: ETH3.1 LT1_U_VT_WRP3.1 | length 971.6
  Top Layer w10: LT1_U_VT_WRP3.1@7009.84,1136.81 7009.84,1091.84 7005,1087 7005,725.99 v1(7014.99,716)
  Bottom Layer w10: v1(7014.99,716) 7213.01,716 7225.01,728 7261,728 7319,670 7382,670 7387,675 7500,675 ETH3.1@7500,703.54
FPGA_SIG81: ETH3.2 LT1_U_VT_WRP3.3 | length 1073
  Top Layer w10: LT1_U_VT_WRP3.3@7061.02,1136.81 7061.02,1007.98 7064,1005 7064,688 7129,623 7173,623 v1(7195,645)
  Bottom Layer w10: v1(7195,645) 7201.17,651.17 7593.17,651.17 7600,658 ETH3.2@7600,703.54
FPGA_SIG82: ETH3.3 LT1_U_VT_WRP3.4 | length 1143.5
  Top Layer w10: LT1_U_VT_WRP3.4@7086.61,1136.81 7086.61,705.39 v1(7140,652)
  Bottom Layer w10: v1(7140,652) 7175.82,616.18 7223.41,616.18 7240.41,633.17 7673.17,633.17 7700,660 ETH3.3@7700,703.54
FPGA_SIG83: ETH3.4 LT1_U_VT_WRP3.5 | length 1485.9
  Top Layer w10: LT1_U_VT_WRP3.5@7112.2,1136.81 7112.2,747.8 7160,700 v1(7241,700)
  Bottom Layer w10: v1(7241,700) 7226.51,700 7215.51,689 7130,689 7111,670 7111,636.59 7149.59,598 7241.23,598 7258.23,615 7692,615 7740,663 7800,663 ETH3.4@7800,703.54
FPGA_SIG84: ETH3.5 LT1_U_VT_WRP3.6 | length 1214.1
  Top Layer w10: LT1_U_VT_WRP3.6@7137.8,1136.81 7137.8,767.2 v1(7159,746)
  Bottom Layer w10: v1(7159,746) 7424,746 7451.92,773.92 7848,773.92 7853,768.92 7853,732.31 7862.31,723 7900,723 ETH3.5@7900,703.54
FPGA_SIG85: ETH3.6 LT1_U_VT_WRP3.7 | length 1260.5
  Top Layer w10: LT1_U_VT_WRP3.7@7163.39,1136.81 7163.39,800 7183.39,780 v1(7261,780)
  Bottom Layer w10: v1(7261,780) 7276,765 7403,765 7429.92,791.92 7860,791.92 7896,755.92 7933,755.92 7933,740 7943,730 8000,730 ETH3.6@8000,703.54
FPGA_SIG86: ETH3.7 LT1_U_VT_WRP3.8 | length 1294.5
  Top Layer w10: LT1_U_VT_WRP3.8@7188.98,1136.81 7188.98,828.02 v1(7207.08,809.92)
  Bottom Layer w10: v1(7207.08,809.92) 7884,809.92 7920,773.92 7950.69,773.92 7968.69,755.92 8033,755.92 8045.92,743 8100,743 ETH3.7@8100,703.54
FPGA_SIG87: ETH3.8 LT1_U_VT_WRP3.9 | length 1328.2
  Top Layer w10: LT1_U_VT_WRP3.9@7214.57,1136.81 7214.57,898.43 v1(7242,871)
  Bottom Layer w10: v1(7242,871) 7285.08,827.92 7902,827.92 7938,791.92 7968.69,791.92 7986.69,773.92 8050.69,773.92 8061.6,763 8181,763 8200,744 ETH3.8@8200,703.54
FPGA_SIG88: ETH3.9 LT2_U_VT_WRP3.1 | length 2719.6
  Top Layer w10: v1(7441.5,581.5) 7343,680 7343,810 7443,910 v1(7443,1930) ; v1(7687,1930) 7701,1916 7734.84,1916 LT2_U_VT_WRP3.1@7734.84,1886.81
  Bottom Layer w10: v1(7441.5,581.5) 7453,593 7951,593 7970,574 8032,574 8078,620 8280,620 8300,640 ETH3.9@8300,703.54 ; v1(7443,1930) v1(7687,1930)
FPGA_SIG89: ETH3.10 LT2_U_VT_WRP3.3 | length 1865.1
  Top Layer w10: v1(7766,1811) 7786.02,1831.02 LT2_U_VT_WRP3.3@7786.02,1886.81 ; v1(8368,1612) 8393,1587 8393,643 v1(8374,624)
  Bottom Layer w10: v1(7766,1811) 8005,1811 8204,1612 v1(8368,1612) ; v1(8374,624) 8400,650 ETH3.10@8400,703.54
FPGA_SIG90: ETH3.11 LT2_U_VT_WRP3.4 | length 2746.4
  Top Layer w10: v1(7760,626) 7760,654 7716,698 7716,1642 7741,1667 7769,1667 7781,1655 7781,1605 7761,1585 7761,1441 7776,1426 7804,1426 7818,1440 7818,1754.61 7811.61,1761 LT2_U_VT_WRP3.4@7811.61,1886.81
  Bottom Layer w10: v1(7760,626) 7951,626 7982,595 8026,595 8082,651 8240,651 8250,661 8250,746 8260,756 8426,756 8478.46,703.54 ETH3.11@8500,703.54
FPGA_SIG91: ETH3.12 LT2_U_VT_WRP3.5 | length 5439.6
  Top Layer w10: v1(7401.43,511) 7325,587.43 7325,848 7414,937 7414,1943 7434,1963 v1(7434,2154) ; v1(7815,2040) 7847,2008 7847,1940 7837.2,1930.2 LT2_U_VT_WRP3.5@7837.2,1886.81
  Bottom Layer w10: v1(7401.43,511) 9317,511 9345,539 9345,625 9339,631 8976,631 8940,667 8940,749 8930,759 8870,759 8857,746 8857,680 8825,648 8768,648 8756,660 8756,740 8729,767 8622,767 8600,745 ETH3.12@8600,703.54 ; v1(7434,2154) 7701,2154 v1(7815,2040)
FPGA_SIG92: ETH3.13 LT2_U_VT_WRP3.6 | length 2177.8
  Top Layer w10: v1(7764,871) 7758,877 7758,1335 7846,1423 7846,1749 7862.8,1765.8 LT2_U_VT_WRP3.6@7862.8,1886.81
  Bottom Layer w10: v1(7764,871) 7789.08,845.92 7930.93,845.92 7966.93,809.92 7986.69,809.92 8004.69,791.92 8068.69,791.92 8078.6,782 8511.18,782 8560,733.18 8560,661 8570,651 8690,651 8700,661 ETH3.13@8700,703.54
FPGA_SIG93: ETH3.14 LT2_U_VT_WRP3.7 | length 2154.2
  Top Layer w10: v1(7786,926) 7786,1325 7888.39,1427.39 LT2_U_VT_WRP3.7@7888.39,1886.81
  Bottom Layer w10: v1(7786,926) 7848.08,863.92 7948.93,863.92 7984.93,827.92 8004.69,827.92 8022.6,810 8770,810 8800,780 ETH3.14@8800,703.54
FPGA_SIG94: ETH3.15 LT2_U_VT_WRP3.8 | length 2655.7
  Top Layer w10: v1(7792,560) 7814.07,582.07 7814.07,1325.07 7909,1420 7909,1823.31 7913.98,1828.29 LT2_U_VT_WRP3.8@7913.98,1886.81
  Bottom Layer w10: v1(7792,560) 7822,530 8636,530 8697,591 8735,591 8741,585 8900,585 8914,599 8914,664 8900,678 ETH3.15@8900,703.54
FPGA_SIG95: ETH3.16 LT2_U_VT_WRP3.9 | length 5142.1
  Top Layer w10: v1(7549,1348) 7549,1070 7578,1041 v1(7578,870) ; v1(7930,1393) 7939.57,1402.57 LT2_U_VT_WRP3.9@7939.57,1886.81
  Bottom Layer w10: v1(7549,1348) 7885,1348 v1(7930,1393) ; v1(7578,870) 7311,870 7282,899 7154,899 6978,723 6978,675 7174,479 7584,479 7597,492 9341,492 9364,515 9364,639 9352,651 9010,651 9000,661 ETH3.16@9000,703.54
FPGA_SIG96: ETH3.25 LT1_U_VT_WRP2.1 | length 1970.9
  Top Layer w10: v1(9677,332) 9677,469.15 9726,518.15 9726,1020.19 9737,1031.19 9737,1172.4 9746.6,1182 9837.48,1182 9986.64,1331.16 9990.16,1331.16 LT1_U_VT_WRP2.1@9990.16,1363.19
  Bottom Layer w10: ETH3.25@9000,396.46 9000,346.08 9016.15,329.93 9030.07,329.93 9033.92,326.08 9449.77,326.08 9475.69,352 9554.08,352 9574.08,332 v1(9677,332)
FPGA_SIG97: ETH3.26 LT1_U_VT_WRP2.3 | length 2033.2
  Top Layer w10: v1(9587.08,290.08) 9649,352 9649,477.15 9684.15,512.3 9684.15,1016.37 9717.78,1050 9717.78,1185.28 9733.5,1201 9831,1201 9938.98,1308.98 LT1_U_VT_WRP2.3@9938.98,1363.19
  Bottom Layer w10: ETH3.26@8900,396.46 8900,352 8961.92,290.08 v1(9587.08,290.08)